# EAGLE board PCB (EAGLE 9.7.0)
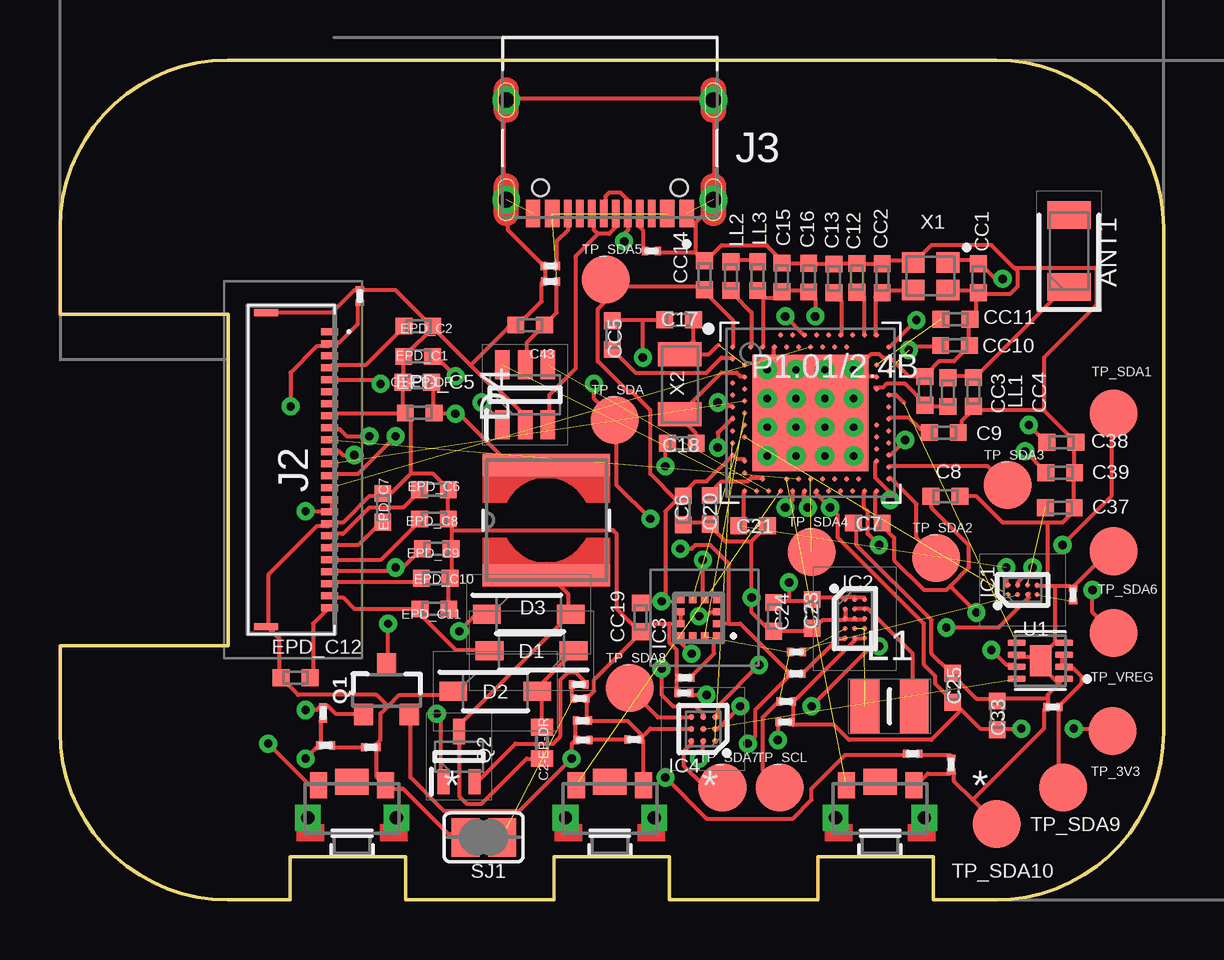
[diagram p0: board, top side]
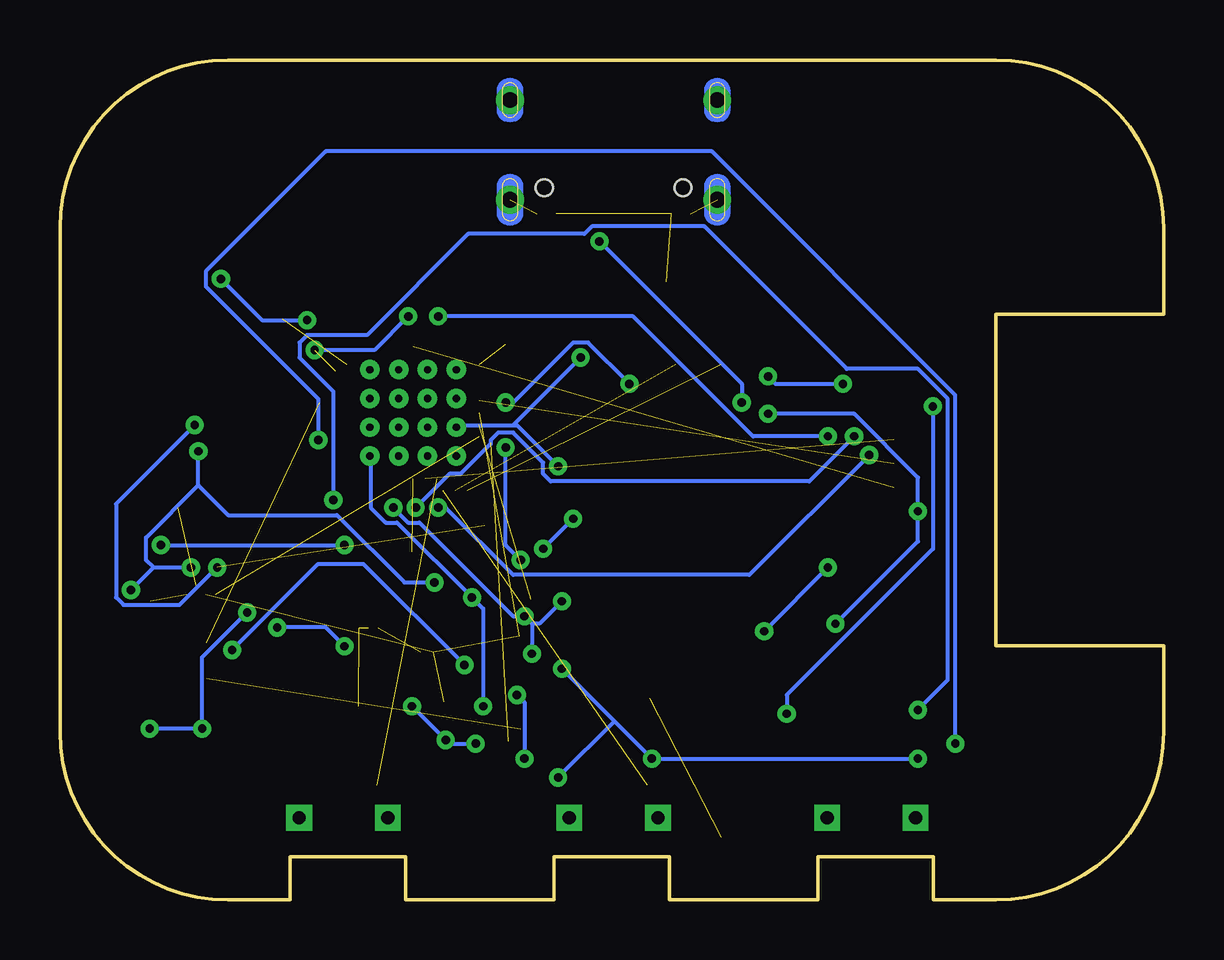
[diagram p1: board, bottom side, seen from below]

Size 46 x 35 mm. Coordinates in mm from the lower left corner, seen from the top.
Outline: 39,0 36.4,0 36.4,1.8 31.6,1.8 31.6,0 25.4,0 25.4,1.8 20.6,1.8 20.6,0 14.4,0 14.4,1.8 9.6,1.8 9.6,0 7,0 arc-90 0,7 0,10.6 7,10.6 7,24.4 0,24.4 0,28 arc-90 7,35 39,35 arc-90 46,28 46,7 arc-90 39,0
Copper layers (1*16): Top 0.035mm / dielectric 1.5mm / Bottom 0.035mm
Design rules "Fusion Electronics Design Rules": minimum track width 0.16mm, minimum drill 0.35mm, track to track 6mil, track to pad 6mil, pad to pad 6mil, via to via 6mil, smd to smd 6mil, copper to edge 40mil, drill to drill 6mil, minimum pad ring 10mil, minimum via ring 8mil, stop-mask expansion 4mil, vias tented up to drill 9999mil, thermal gap 10mil
tKeepout: area 40.9,24.6 to 43.3,29.4
bKeepout: area 40.9,24.7 to 43.3,29.3

## Footprints (pad centres in the part's own frame; a part is rotated, then mirrored left to right if it is on the bottom)
2450AT18B100E_ANTC3216X140N = smd 1.15 x 1.8: 1 -1.5,0; 2 1.5,0
NORDIC_NRF_3_RESC0402_M = smd 0.7 x 0.7: 1 -0.6,0; 2 0.6,0
GRM011R60J152KE01L_1_0201 = smd 0.35 x 0.25: 1 0,0.275; 2 0,-0.275
ESP32_C6_LIBRARY_1_ESP32_WROVER_EAGLE-LTSPICE_C0402 = smd 0.7 x 0.9: 1 -0.65,0; 2 0.65,0
ESP32_C6_LIBRARY_5_SOD3716X135N = smd 1.15 x 0.8: 1 -1.75,0; 2 1.75,0
ESP32_C6_LIBRARY_3_SOT95P280X145-6N = smd 1.2 x 0.6: 1 -1.25,0.95; 2 -1.25,0; 3 -1.25,-0.95; 4 1.25,-0.95; 5 1.25,0; 6 1.25,0.95
BQ25180YBGR_BGA8C40P2X4_100X155X50 = smd 0.2 x 0.2: A1 -0.2,0.6; A2 0.2,0.6; B1 -0.2,0.2; B2 0.2,0.2; C1 -0.2,-0.2; C2 0.2,-0.2; D1 -0.2,-0.6; D2 0.2,-0.6
RT6160AWSC_BGA15C40P3X5_140X230X60 = smd 0.216 x 0.216: A1 -0.4,0.8; A2 0,0.8; A3 0.4,0.8; B1 -0.4,0.4; B2 0,0.4; B3 0.4,0.4; C1 -0.4,0; C2 0,0; C3 0.4,0; D1 -0.4,-0.4; D2 0,-0.4; D3 0.4,-0.4; E1 -0.4,-0.8; E2 0,-0.8; E3 0.4,-0.8
BMA423_BMA423 = smd 0.3 x 0.35: 1 -0.75,-0.775; 2 -0.25,-0.775; 3 0.25,-0.775; 4 0.75,-0.775; 7 0.75,0.775; 8 0.25,0.775; 9 -0.25,0.775; 10 -0.75,0.775 | smd 0.35 x 0.3: 5 0.775,-0.25; 6 0.775,0.25; 11 -0.775,0.25; 12 -0.775,-0.25
DRV2605YZFR_BGA9C50P3X3_144X144X62 = smd 0.25 x 0.25: A1 -0.5,0.5; A2 0,0.5; A3 0.5,0.5; B1 -0.5,0; B2 0,0; B3 0.5,0; C1 -0.5,-0.5; C2 0,-0.5; C3 0.5,-0.5
503480-2400_5034802400 = smd 0.3 x 0.7: 1 -5.75,1.525; 2 -5.25,1.525; 3 -4.75,1.525; 4 -4.25,1.525; 5 -3.75,1.525; 6 -3.25,1.525; 7 -2.75,1.525; 8 -2.25,1.525; 9 -1.75,1.525; 10 -1.25,1.525; 11 -0.75,1.525; 12 -0.25,1.525; 13 0.25,1.525; 14 0.75,1.525; 15 1.25,1.525; 16 1.75,1.525; 17 2.25,1.525; 18 2.75,1.525; 19 3.25,1.525; 20 3.75,1.525; 21 4.25,1.525; 22 4.75,1.525; 23 5.25,1.525; 24 5.75,1.525 | smd 0.3 x 1: MP1 -6.54,-1.125; MP2 6.54,-1.125
KH-TYPE-C-16P_KINGHELM_KH-TYPE-C-16P = smd 0.6 x 1.15: A1_B12 -3.2,4.725; A4_B9 -2.4,4.725; A9_B4 2.4,4.725; A12_B1 3.2,4.725 | smd 0.3 x 1.15: A5 -1.25,4.725; A6 -0.25,4.725; A7 0.25,4.725; A8 1.25,4.725; B5 1.75,4.725; B6 0.75,4.725; B7 -0.75,4.725; B8 -1.75,4.725 | drill 0.65 pad 1.05: SH1 -4.32,0; SH2 4.32,0; SH3 -4.32,4.15; SH4 4.32,4.15 | hole 0.7: -2.89,3.65; 2.89,3.65
MLP2016SR47MT0S1_INDC2016X100N = smd 1.2 x 2.2: 1 -1.028,0; 2 1.028,0
ESP32_C6_LIBRARY_2_IND_4828-WE-TPC_WRE = smd 0.9 x 5.3: 1 -2.286,0; 2 2.286,0
NORDIC_NRF_2_RESC0402_M = smd 0.7 x 0.7: 1 -0.6,0; 2 0.6,0
NORDIC_NRF_4_AQFN50P700X700X85_HS-74N = smd 4.85 x 4.85: P$74 0,0 | drill 0.3 pad 0.6: P$75 -1.8,1.8; P$76 -0.6,1.8; P$77 0.6,1.8; P$78 1.8,1.8; P$79 -1.8,0.6; P$80 -0.6,0.6; P$81 0.6,0.6; P$82 1.8,0.6; P$83 -1.8,-0.6; P$84 -0.6,-0.6; P$85 0.6,-0.6; P$86 1.8,-0.6; P$87 -1.8,-1.8; P$88 -0.6,-1.8; P$89 0.6,-1.8; P$90 1.8,-1.8 | smd 0.2 x 0.2: P$A8 -1.25,3.25; P$A10 -0.75,3.25; P$A12 -0.25,3.25; P$A14 0.25,3.25; P$A16 0.75,3.25; P$A18 1.25,3.25; P$A20 1.75,3.25; P$A22 2.25,3.25; P$A23 2.75,3.25; P$AA24 3.25,-2.25; P$AB2 -2.75,-2.5; P$AC5 -2,-2.75; P$AC9 -1,-2.75; P$AC11 -0.5,-2.75; P$AC13 0,-2.75; P$AC15 0.5,-2.75; P$AC17 1,-2.75; P$AC19 1.5,-2.75; P$AC21 2,-2.75; P$AC24 3.25,-2.75; P$AD2 -2.75,-3.25; P$AD4 -2.25,-3.25; P$AD6 -1.75,-3.25; P$AD8 -1.25,-3.25; P$AD10 -0.75,-3.25; P$AD12 -0.25,-3.25; P$AD14 0.25,-3.25; P$AD16 0.75,-3.25; P$AD18 1.25,-3.25; P$AD20 1.75,-3.25; P$AD22 2.25,-3.25; P$AD23 2.75,-3.25; P$B1 -3.25,2.75; P$B3 -2.5,2.75; P$B5 -2,2.75; P$B7 -1.5,2.75; P$B9 -1,2.75; P$B11 -0.5,2.75; P$B13 0,2.75; P$B15 0.5,2.75; P$B17 1,2.75; P$B19 1.5,2.75; P$B24 3.25,2.75; P$C1 -3.25,2.25; P$D2 -2.75,2; P$D23 2.75,2; P$E24 3.25,1.75; P$F2 -2.75,1.5; P$F23 2.75,1.5; P$G1 -3.25,1.25; P$H2 -2.75,1; P$H23 2.75,1; P$J1 -3.25,0.75; P$J24 3.25,0.75; P$K2 -2.75,0.5; P$L1 -3.25,0.25; P$L24 3.25,0.25; P$M2 -2.75,0; P$N1 -3.25,-0.25; P$N24 3.25,-0.25; P$P2 -2.75,-0.5; P$P23 2.75,-0.5; P$R1 -3.25,-0.75; P$R24 3.25,-0.75; P$T2 -2.75,-1; P$T23 2.75,-1; P$U1 -3.25,-1.25; P$U24 3.25,-1.25; P$V23 2.75,-1.5; P$W1 -3.25,-1.75; P$W24 3.25,-1.75; P$Y2 -2.75,-2; P$Y23 2.75,-2
ESP32_C6_LIBRARY_4_ESP32_C6_LIBRARY_4_ESP32_C6_LIBRARY_4_ESP32_C6_LIBRARY_4_ESP32_WROVER_SPARKFUN-DISCRETESEMI_SOT23-3 = smd 0.8 x 0.9: 1 -0.95,-1; 2 0.95,-1; 3 0,1.1
ESP32_C6_LIBRARY_6_SOT65P210X110-3N = smd 1.05 x 0.5: 1 -1.05,0.65; 2 -1.05,-0.65; 3 1.05,0
CPF0201D7K68C1_0201 = smd 0.35 x 0.25: 1 0,0.275; 2 0,-0.275
ESP32_C6_LIBRARY_7_JUMPER_SJ = smd 1.168 x 1.6: 1 -0.762,0; 2 0.762,0
2025-10-22_07-23-44_LIBRARY_SW_EVP-AKE31A_PAN = smd 0.711 x 1.092: 1 -1.4,-0.972; 2 1.4,-0.972 | drill 0.559 pad 0.914 square: 3 -1.848,0.381; 4 1.848,0.381 | smd 1.397 x 1.092: 5 0,-1.124
HECTOR_WATCH_1_TP20R = smd 2 x 2: TP 0,0
ESP32_C6_LIBRARY_SON50P200X200X80-9N = smd 0.76 x 0.27: 1 -0.985,0.75; 2 -0.985,0.25; 3 -0.985,-0.25; 4 -0.985,-0.75; 5 0.985,-0.75; 6 0.985,-0.25; 7 0.985,0.25; 8 0.985,0.75 | smd 0.9 x 1.3: 9 0,0
NORDIC_NRF_BT-XTAL_2016_N = smd 0.95 x 0.85: 1 -0.725,-0.575; 2 0.725,-0.575; 3 0.725,0.575; 4 -0.725,0.575
NORDIC_NRF_1_XTAL_3215_N = smd 1 x 1.8: 1 -1.25,0; 2 1.25,0

## Placement (x,y rotation side)
ANT1  2450AT18B100E_2450AT18B100E  [2450AT18B100E_ANTC3216X140N]  42.06,27.04 90 top
C1-EP-DR  10uF  [NORDIC_NRF_3_RESC0402_M]  14.89,21.58 180 top
C2  GRM011R60J152KE01L_1_GRM011R60J152KE01L  [GRM011R60J152KE01L_1_0201]  41.39,8.04 90 top
C2-EP-DR  4.7uF/25V  [ESP32_C6_LIBRARY_1_ESP32_WROVER_EAGLE-LTSPICE_C0402]  20.09,6.54 270 top
C3  1uF  [GRM011R60J152KE01L_1_0201]  26.01,8.62 90 top
C4  0.1uF  [GRM011R60J152KE01L_1_0201]  21.78,7.47 270 top
C5  GRM011R60J152KE01L_1_GRM011R60J152KE01L  [GRM011R60J152KE01L_1_0201]  12.96,6.36 270 top
C6  4.7uF  [NORDIC_NRF_3_RESC0402_M]  25.98,16.24 90 top
C7  100nF  [NORDIC_NRF_3_RESC0402_M]  33.67,15.71 180 top
C8  100nF  [NORDIC_NRF_3_RESC0402_M]  36.91,16.83 0 top
C9  820pF  [NORDIC_NRF_3_RESC0402_M]  36.84,19.48 0 top
C10  GRM011R60J152KE01L_1_GRM011R60J152KE01L  [GRM011R60J152KE01L_1_0201]  23.92,6.69 270 top
C11  GRM011R60J152KE01L_1_GRM011R60J152KE01L  [GRM011R60J152KE01L_1_0201]  37.15,5.64 180 top
C12  100pF  [NORDIC_NRF_3_RESC0402_M]  33.22,25.92 90 top
C13  N.C  [NORDIC_NRF_3_RESC0402_M]  32.26,25.9 90 top
C15  1uF  [NORDIC_NRF_3_RESC0402_M]  30.09,25.94 90 top
C16  47nF  [NORDIC_NRF_3_RESC0402_M]  31.21,25.93 90 top
C17  12pF  [NORDIC_NRF_3_RESC0402_M]  25.81,24.18 180 top
C18  12pF  [NORDIC_NRF_3_RESC0402_M]  25.92,19.03 180 top
C20  4.7uF  [NORDIC_NRF_3_RESC0402_M]  27.1,16.25 90 top
C21  4.7uF  [NORDIC_NRF_3_RESC0402_M]  28.89,15.6 0 top
C23  0.1uF  [NORDIC_NRF_3_RESC0402_M]  31.35,11.92 90 top
C24  10uF  [NORDIC_NRF_3_RESC0402_M]  29.75,11.79 90 top
C25  22uF  [NORDIC_NRF_3_RESC0402_M]  37.21,8.84 90 top
C33  22uF  [NORDIC_NRF_3_RESC0402_M]  39.06,7.69 90 top
C37  1uF  [NORDIC_NRF_3_RESC0402_M]  41.67,16.34 0 top
C38  1uF  [NORDIC_NRF_3_RESC0402_M]  41.74,19.07 0 top
C39  10uF  [NORDIC_NRF_3_RESC0402_M]  41.69,17.81 0 top
C42  GRM011R60J152KE01L_1_GRM011R60J152KE01L  [GRM011R60J152KE01L_1_0201]  20.45,25.77 90 top
C43  4.7uF  [NORDIC_NRF_3_RESC0402_M]  19.6,23.96 180 top
CC1  12pF  [NORDIC_NRF_3_RESC0402_M]  38.28,25.91 270 top
CC2  12pF  [NORDIC_NRF_3_RESC0402_M]  34.27,25.91 90 top
CC3  1pF  [NORDIC_NRF_3_RESC0402_M]  36.05,21.21 270 top
CC4  1pF  [NORDIC_NRF_3_RESC0402_M]  38.08,21.17 90 top
CC5  100nF  [NORDIC_NRF_3_RESC0402_M]  23.02,23.54 270 top
CC10  N.C  [NORDIC_NRF_3_RESC0402_M]  37.31,23.11 0 top
CC11  100pF  [NORDIC_NRF_3_RESC0402_M]  37.32,24.2 0 top
CC14  4.7uF  [NORDIC_NRF_3_RESC0402_M]  26.87,26.03 270 top
CC19  100nF  [NORDIC_NRF_3_RESC0402_M]  24.2,11.78 270 top
D1  ESP32_C6_LIBRARY_5_MBR0530  [ESP32_C6_LIBRARY_5_SOD3716X135N]  19.66,10.38 180 top
D2  ESP32_C6_LIBRARY_5_MBR0530  [ESP32_C6_LIBRARY_5_SOD3716X135N]  18.15,8.69 0 top
D3  ESP32_C6_LIBRARY_5_MBR0530  [ESP32_C6_LIBRARY_5_SOD3716X135N]  19.53,11.9 0 top
D4  ESP32_C6_LIBRARY_3_USBLC6-2SC6Y  [ESP32_C6_LIBRARY_3_SOT95P280X145-6N]  19.39,21.05 90 top
EPD_C1  1uF/50V  [NORDIC_NRF_3_RESC0402_M]  14.93,22.65 0 top
EPD_C2  1uF/50V  [NORDIC_NRF_3_RESC0402_M]  14.94,23.91 180 top
EPD_C5  0.1uF/50V  [NORDIC_NRF_3_RESC0402_M]  15,20.29 0 top
EPD_C6  1uF/50V  [NORDIC_NRF_3_RESC0402_M]  15.59,17.09 180 top
EPD_C7  1uF/50V  [NORDIC_NRF_3_RESC0402_M]  13.46,16.34 270 top
EPD_C8  1uF/50V  [NORDIC_NRF_3_RESC0402_M]  15.59,15.88 180 top
EPD_C9  1uF/50V  [NORDIC_NRF_3_RESC0402_M]  15.71,14.64 180 top
EPD_C10  1uF/50V  [NORDIC_NRF_3_RESC0402_M]  15.66,13.41 180 top
EPD_C11  1uF/50V  [NORDIC_NRF_3_RESC0402_M]  15.61,12.13 180 top
EPD_C12  1uF/50V  [NORDIC_NRF_3_RESC0402_M]  9.82,9.26 0 top
IC1  BQ25180YBGR_BQ25180YBGR  [BQ25180YBGR_BGA8C40P2X4_100X155X50]  40.13,12.92 90 top
IC2  RT6160AWSC_RT6160AWSC  [RT6160AWSC_BGA15C40P3X5_140X230X60]  33.13,11.72 0 top
IC3  BMA423_BMA423  [BMA423_BMA423]  26.62,11.75 90 top
IC4  DRV2605YZFR_DRV2605YZFR  [DRV2605YZFR_BGA9C50P3X3_144X144X62]  26.8,7.12 180 top
J2  503480-2400_503480-2400  [503480-2400_5034802400]  9.72,17.93 270 top
J3  KH-TYPE-C-16P_KH-TYPE-C-16P  [KH-TYPE-C-16P_KINGHELM_KH-TYPE-C-16P]  22.92,33.33 180 top
L1  MLP2016SR47MT0S1_FTC252012SR47MBCA  [MLP2016SR47MT0S1_INDC2016X100N]  34.57,8.07 180 top
L2  ESP32_C6_LIBRARY_2_744043680IND_4828-WE-TPC_WRE  [ESP32_C6_LIBRARY_2_IND_4828-WE-TPC_WRE]  20.27,15.83 90 top
LL1  3.9nH  [NORDIC_NRF_2_RESC0402_M]  37.01,21.16 90 top
LL2  10uH  [NORDIC_NRF_2_RESC0402_M]  27.97,26 270 top
LL3  15uH  [NORDIC_NRF_2_RESC0402_M]  29.08,25.99 90 top
P1.01/2.4B  NORDIC_NRF_4_NRF52840_QF  [NORDIC_NRF_4_AQFN50P700X700X85_HS-74N]  31.28,20.3 0 top
Q1  20V/4.2A/52mΩ/1.4W  [ESP32_C6_LIBRARY_4_ESP32_C6_LIBRARY_4_ESP32_C6_LIBRARY_4_ESP32_C6_LIBRARY_4_ESP32_WROVER_SPARKFUN-DISCRETESEMI_SOT23-3]  13.61,8.73 0 top
Q2  ESP32_C6_LIBRARY_6_SI1308EDL-T1-GE3  [ESP32_C6_LIBRARY_6_SOT65P210X110-3N]  16.64,5.97 90 top
R1  10K  [CPF0201D7K68C1_0201]  42.23,12.72 0 top
R2  CPF0201D7K68C1_CPF0201D7K68C1  [CPF0201D7K68C1_0201]  30.7,10.33 90 top
R3  CPF0201D7K68C1_CPF0201D7K68C1  [CPF0201D7K68C1_0201]  30.68,9.43 90 top
R4  CPF0201D7K68C1_CPF0201D7K68C1  [CPF0201D7K68C1_0201]  30.27,8.27 90 top
R5  CPF0201D7K68C1_CPF0201D7K68C1  [CPF0201D7K68C1_0201]  30.22,7.41 90 top
R6  CPF0201D7K68C1_CPF0201D7K68C1  [CPF0201D7K68C1_0201]  12.5,25.17 0 top
R7  CPF0201D7K68C1_CPF0201D7K68C1  [CPF0201D7K68C1_0201]  10.97,7.79 0 top
R8  CPF0201D7K68C1_CPF0201D7K68C1  [CPF0201D7K68C1_0201]  26.05,9.26 270 top
R9  CPF0201D7K68C1_CPF0201D7K68C1  [CPF0201D7K68C1_0201]  21.62,8.98 90 top
R10  CPF0201D7K68C1_CPF0201D7K68C1  [CPF0201D7K68C1_0201]  21.68,8.4 270 top
R11  CPF0201D7K68C1_CPF0201D7K68C1  [CPF0201D7K68C1_0201]  11.07,6.45 270 top
R12  CPF0201D7K68C1_CPF0201D7K68C1  [CPF0201D7K68C1_0201]  21.81,6.67 270 top
R13  CPF0201D7K68C1_CPF0201D7K68C1  [CPF0201D7K68C1_0201]  35.54,6.09 270 top
R14  CPF0201D7K68C1_CPF0201D7K68C1  [CPF0201D7K68C1_0201]  24.66,27.04 90 top
R15  CPF0201D7K68C1_CPF0201D7K68C1  [CPF0201D7K68C1_0201]  20.44,26.41 90 top
SJ1  0  [ESP32_C6_LIBRARY_7_JUMPER_SJ]  17.66,2.61 0 top
SW1  2025-10-22_07-23-44_LIBRARY_EVP-AKE31ASW_EVP-AKE31A_PAN  [2025-10-22_07-23-44_LIBRARY_SW_EVP-AKE31A_PAN]  22.92,3.81 180 top
SW2  2025-10-22_07-23-44_LIBRARY_EVP-AKE31ASW_EVP-AKE31A_PAN  [2025-10-22_07-23-44_LIBRARY_SW_EVP-AKE31A_PAN]  34.18,3.81 180 top
SW3  2025-10-22_07-23-44_LIBRARY_EVP-AKE31ASW_EVP-AKE31A_PAN  [2025-10-22_07-23-44_LIBRARY_SW_EVP-AKE31A_PAN]  12.17,3.81 180 top
TP_3V3  HECTOR_WATCH_1_TPTP20R  [HECTOR_WATCH_1_TP20R]  43.87,7.04 0 top
TP_SCL  HECTOR_WATCH_1_TPTP20R  [HECTOR_WATCH_1_TP20R]  30.01,4.69 0 top
TP_SDA  HECTOR_WATCH_1_TPTP20R  [HECTOR_WATCH_1_TP20R]  23.13,20.01 0 top
TP_SDA1  HECTOR_WATCH_1_TPTP20R  [HECTOR_WATCH_1_TP20R]  43.91,20.27 0 top
TP_SDA2  HECTOR_WATCH_1_TPTP20R  [HECTOR_WATCH_1_TP20R]  36.53,14.26 0 top
TP_SDA3  HECTOR_WATCH_1_TPTP20R  [HECTOR_WATCH_1_TP20R]  39.5,17.29 0 top
TP_SDA4  HECTOR_WATCH_1_TPTP20R  [HECTOR_WATCH_1_TP20R]  31.33,14.5 0 top
TP_SDA5  HECTOR_WATCH_1_TPTP20R  [HECTOR_WATCH_1_TP20R]  22.74,25.86 0 top
TP_SDA6  HECTOR_WATCH_1_TPTP20R  [HECTOR_WATCH_1_TP20R]  43.91,14.53 0 top
TP_SDA7  HECTOR_WATCH_1_TPTP20R  [HECTOR_WATCH_1_TP20R]  27.62,4.68 0 top
TP_SDA8  HECTOR_WATCH_1_TPTP20R  [HECTOR_WATCH_1_TP20R]  23.75,8.84 0 top
TP_SDA9  HECTOR_WATCH_1_TPTP20R  [HECTOR_WATCH_1_TP20R]  41.81,4.68 0 top
TP_SDA10  HECTOR_WATCH_1_TPTP20R  [HECTOR_WATCH_1_TP20R]  39.05,3.17 0 top
TP_VREG  HECTOR_WATCH_1_TPTP20R  [HECTOR_WATCH_1_TP20R]  43.91,11.12 0 top
U1  ESP32_C6_LIBRARY_MAX17048G+T10  [ESP32_C6_LIBRARY_SON50P200X200X80-9N]  40.87,9.97 180 top
X1  32MHz  [NORDIC_NRF_BT-XTAL_2016_N]  36.29,25.99 180 top
X2  32.768KHz  [NORDIC_NRF_1_XTAL_3215_N]  25.84,21.48 90 top

## Library data of the parts
ANT1 = InkTime_v5; ARROW_PART_NUMBER: 2450AT18B100E; ARROW_PRICE-STOCK: https://www.arrow.com/en/products/2450at18b100e/johanson-dielectrics?utm_currency=USD&region=nac; DESCRIPTION: Antennas 2.45GHz ANTENNA; HEIGHT: 1.4mm; MANUFACTURER_NAME: JOHANSON TECHNOLOGY; MANUFACTURER_PART_NUMBER: 2450AT18B100E; MOUSER_PART_NUMBER: 609-2450AT18B100E; MOUSER_PRICE-STOCK: https://www.mouser.co.uk/ProductDetail/Johanson-Technology/2450AT18B100E?qs=yCnrNFeXz%252Bh5MFsFIXGZGA%3D%3D
C1-EP-DR C2-C13 C15-C18 C20 C21 C23-C25 C33 C37-C39 C42 C43 CC1-CC5 CC10 CC11 CC14 CC19 EPD_C1 EPD_C2 EPD_C5-EPD_C12 LL1-LL3 P1.01/2.4B R1-R15 SJ1 TP_3V3 TP_SCL TP_SDA TP_SDA1-TP_SDA10 TP_VREG X1 X2 = InkTime_v5
C2-EP-DR = InkTime_v5; SPICEMODEL: NONE; SPICEPREFIX: C
D1-D3 = InkTime_v5; AVAILABILITY: In Stock; CHECK_PRICES: https://www.snapeda.com/parts/MBR0530/Onsemi/view-part/?ref=eda; DESCRIPTION: Diode Schottky 30 V 500mA Surface Mount SOD-123; MF: ON Semiconductor; MP: MBR0530; PACKAGE: SOD-123-2 ON Semiconductor; PRICE: None; PURCHASE-URL: https://www.snapeda.com/api/url_track_click_mouser/?unipart_id=179458&manufacturer=ON Semiconductor&part_name=MBR0530&search_term=None; SNAPEDA_LINK: https://www.snapeda.com/parts/MBR0530/Onsemi/view-part/?ref=snap
D4 = InkTime_v5; AVAILABILITY: In Stock; CHECK_PRICES: https://www.snapeda.com/parts/USBLC6-2SC6Y/STMicroelectronics/view-part/?ref=eda; DESCRIPTION: 17V Clamp 5A (8/20µs) Ipp Tvs Diode Surface Mount SOT-23-6; MF: STMicroelectronics; MP: USBLC6-2SC6Y; PACKAGE: SOT-23-6 STMicroelectronics; PRICE: None; SNAPEDA_LINK: https://www.snapeda.com/parts/USBLC6-2SC6Y/STMicroelectronics/view-part/?ref=snap
IC1 = InkTime_v5; ARROW_PART_NUMBER: BQ25180YBGR; ARROW_PRICE-STOCK: https://www.arrow.com/en/products/bq25180ybgr/texas-instruments?utm_currency=USD&region=nac; DESCRIPTION: Charger IC Lithium Ion/Polymer, Lithium Iron Phosphate 8-DSBGA (1.6x1.1); HEIGHT: 0.5mm; MANUFACTURER_NAME: Texas Instruments; MANUFACTURER_PART_NUMBER: BQ25180YBGR; MOUSER_PART_NUMBER: 595-BQ25180YBGR; MOUSER_PRICE-STOCK: https://www.mouser.co.uk/ProductDetail/Texas-Instruments/BQ25180YBGR?qs=doiCPypUmgEWjAK%252BJAX6Tw%3D%3D
IC2 = InkTime_v5; DESCRIPTION: Buck-Boost Regulator Positive Output Step-Up/Step-Down I2C DC-DC Controller IC 15-WL-CSP (BSC) (1.4x2.3); HEIGHT: 0.6mm; MANUFACTURER_NAME: RICHTEK; MANUFACTURER_PART_NUMBER: RT6160AWSC; MOUSER_PART_NUMBER: 835-RT6160AWSC; MOUSER_PRICE-STOCK: https://www.mouser.co.uk/ProductDetail/Richtek/RT6160AWSC?qs=amGC7iS6iy%2FLd9PSoixZXQ%3D%3D
IC3 = InkTime_v5; ARROW_PART_NUMBER: BMA423; ARROW_PRICE-STOCK: https://www.arrow.com/en/products/bma423/bosch; DESCRIPTION: Accelerometers Triaxial low-g 12bit Acceleration Sensor; HEIGHT: 1mm; MANUFACTURER_NAME: BOSCH; MANUFACTURER_PART_NUMBER: BMA423; MOUSER_PART_NUMBER: 262-BMA423; MOUSER_PRICE-STOCK: https://www.mouser.co.uk/ProductDetail/Bosch-Sensortec/BMA423?qs=HXFqYaX1Q2xC%252BSgeGoX3mg%3D%3D
IC4 = InkTime_v5; ARROW_PART_NUMBER: DRV2605YZFR; ARROW_PRICE-STOCK: https://www.arrow.com/en/products/drv2605yzfr/texas-instruments?region=nac; DESCRIPTION: Haptic Driver for ERM/LRA with Built-In Library and Smart Loop Architecture; HEIGHT: 0.625mm; MANUFACTURER_NAME: Texas Instruments; MANUFACTURER_PART_NUMBER: DRV2605YZFR
J2 = InkTime_v5; DESCRIPTION: FFC & FPC Connectors 0.5mm FPC RA SMT Dual Contact 24Ckt; HEIGHT: 1.87mm; MANUFACTURER_NAME: Molex; MANUFACTURER_PART_NUMBER: 503480-2400; MOUSER_PART_NUMBER: 538-503480-2400; MOUSER_PRICE-STOCK: https://www.mouser.co.uk/ProductDetail/Molex/503480-2400?qs=OAhjpuo3Vu7efIoxFh9AOw%3D%3D
J3 = InkTime_v5; AVAILABILITY: Not in stock; CHECK_PRICES: https://www.snapeda.com/parts/KH-TYPE-C-16P/Kinghelm/view-part/?ref=eda; MF: kinghelm; MP: KH-TYPE-C-16P; PACKAGE: None; PRICE: None; SNAPEDA_LINK: https://www.snapeda.com/parts/KH-TYPE-C-16P/Kinghelm/view-part/?ref=snap
L1 = InkTime_v5; DESCRIPTION: SMD / SMT Inductors (Coils), L=0.47?H, L x W x T :; HEIGHT: 1mm; JLCPCB: https://jlcpcb.com/partdetail/6763488-FTC252012SR47MBCA/C5832368; MANUFACTURER_NAME: TDK; MANUFACTURER_PART_NUMBER: FTC252012SR47MBCA
L2 = InkTime_v5; COPYRIGHT: Copyright (C) 2024 Ultra Librarian. All rights reserved.; MANUFACTURER_PART_NUMBER: 744043680; MFR_NAME: Wurth Electronics
Q1 = InkTime_v5; PROD_ID: TRAN-14388
Q2 = InkTime_v5; AVAILABILITY: In Stock; CHECK_PRICES: https://www.snapeda.com/parts/SI1308EDL-T1-GE3/Vishay+Siliconix/view-part/?ref=eda; DESCRIPTION: Si1308EDL-T1-GE3 N-channel MOSFET Transistor, 1.5 A, 30 V, 3-Pin SC-70 | Siliconix / Vishay SI1308EDL-T1-GE3; MF: Vishay Siliconix; MP: SI1308EDL-T1-GE3; PACKAGE: SOT-323 Vishay Semiconductor; PRICE: None; PURCHASE-URL: https://www.snapeda.com/api/url_track_click_mouser/?unipart_id=274603&manufacturer=Vishay Siliconix&part_name=SI1308EDL-T1-GE3&search_term=None; SNAPEDA_LINK: https://www.snapeda.com/parts/SI1308EDL-T1-GE3/Vishay+Siliconix/view-part/?ref=snap
SW1-SW3 = InkTime_v5; COPYRIGHT: Copyright (C) 2025 Ultra Librarian. All rights reserved.; DIGI-KEY_PART_NUMBER_1: P123437TR-ND; DIGI-KEY_PART_NUMBER_2: P123437CT-ND; DIGI-KEY_PART_NUMBER_3: P123437DKR-ND; MANUFACTURER_NAME: Panasonic; MANUFACTURER_PART_NUMBER: EVP-AKE31A
U1 = InkTime_v5; AVAILABILITY: In Stock; CHECK_PRICES: https://www.snapeda.com/parts/MAX17048G+T10/Analog+Devices/view-part/?ref=eda; DESCRIPTION: 3µA 1-Cell/2-Cell Fuel Gauge with ModelGauge; MF: Analog Devices; MP: MAX17048G+T10; PACKAGE: TDFN-8 Maxim; PRICE: None; PURCHASE-URL: https://www.snapeda.com/api/url_track_click_mouser/?unipart_id=329239&manufacturer=Analog Devices&part_name=MAX17048G+T10&search_term=None; SNAPEDA_LINK: https://www.snapeda.com/parts/MAX17048G+T10/Analog+Devices/view-part/?ref=snap

## Nets
3V3/1.7D: C4.2 IC4.C2 Q1.2 R7.2 R11.2 R12.2 R13.2
3V3/2.4A: C6.2 C7.1 C8.1 C25.1 C33.1 CC14.2 CC19.1 IC2.E2 IC2.E3 IC3.3 IC3.7 IC3.10 P1.01/2.4B.P$AD14 P1.01/2.4B.P$AD23 P1.01/2.4B.P$B1 P1.01/2.4B.P$W1 P1.01/2.4B.P$Y2 R4.2 R5.2 TP_3V3.TP TP_SDA5.TP
ALERT: P1.01/2.4B.P$J24 U1.5
D+: D4.4 P1.01/2.4B.P$AD6
D-: D4.6 P1.01/2.4B.P$AD4
DN: D4.1 J3.A7 J3.B7
DP: D4.3 J3.A6 J3.B6
EPD_3V3: C1-EP-DR.1 EPD_C5.2 J2.15 J2.16 L2.2 Q1.3
EPD_BUSY: J2.9 P1.01/2.4B.P$AD12
EPD_CS: J2.12 P1.01/2.4B.P$K2
EPD_DC: J2.11 P1.01/2.4B.P$AD10
EPD_RST: J2.10 P1.01/2.4B.P$AC11
GDR: J2.2 Q2.1 R6.2
GND: C1-EP-DR.2 C2.1 C3.1 C4.1 C5.1 C6.1 C7.2 C8.2 C9.2 C10.1 C11.1 C12.2 C13.2 C15.2 C16.2 C17.2 C18.2 C20.1 C21.2 C23.1 C24.1 C25.2 C33.2 C37.2 C38.2 C39.2 C42.1 C43.2 CC1.2 CC2.2 CC3.1 CC4.1 CC5.1 CC10.2 CC11.2 CC14.1 CC19.2 D2.1 D4.2 EPD_C1.1 EPD_C2.1 EPD_C5.1 EPD_C6.1 EPD_C7.1 EPD_C8.1 EPD_C9.1 EPD_C10.1 EPD_C11.1 EPD_C12.1 IC1.D2 IC2.B1 IC2.C1 IC2.C2 IC2.C3 IC3.8 IC3.9 IC4.B1 IC4.B3 J2.8 J2.17 J2.MP1 J2.MP2 J3.A1_B12 J3.A12_B1 J3.SH1 J3.SH2 J3.SH3 J3.SH4 P1.01/2.4B.P$74 P1.01/2.4B.P$75 P1.01/2.4B.P$76 P1.01/2.4B.P$77 P1.01/2.4B.P$78 P1.01/2.4B.P$79 P1.01/2.4B.P$80 P1.01/2.4B.P$81 P1.01/2.4B.P$82 P1.01/2.4B.P$83 P1.01/2.4B.P$84 P1.01/2.4B.P$85 P1.01/2.4B.P$86 P1.01/2.4B.P$87 P1.01/2.4B.P$88 P1.01/2.4B.P$89 P1.01/2.4B.P$90 P1.01/2.4B.P$B7 P1.01/2.4B.P$F23 R1.1 R6.1 R8.2 R10.1 R14.2 R15.1 SJ1.1 SW1.1 SW2.1 SW3.1 TP_SDA6.TP TP_SDA10.TP U1.1 U1.4 U1.6 U1.9 X1.2 X1.4
HAPTIC_EN: IC4.A1 P1.01/2.4B.P$U1
IMU_INT1: IC3.5 P1.01/2.4B.P$N1
IMU_INT2: IC3.6 P1.01/2.4B.P$P2
LX1: IC2.B2 IC2.B3 L1.1
LX2: IC2.D2 IC2.D3 L1.2
MOSI: J2.14 P1.01/2.4B.P$B13
N$1: IC1.D1 R1.2
N$2: C9.1 P1.01/2.4B.P$N24
N$3: CC3.2 LL1.1 P1.01/2.4B.P$H23
N$4: IC2.D1 R2.2
N$5: IC2.E1 R3.2
N$6: C20.2 P1.01/2.4B.P$AC5
N$7: ANT1.1 CC4.2 LL1.2
N$8: CC1.1 P1.01/2.4B.P$B24 X1.1
N$9: CC2.1 P1.01/2.4B.P$A23 X1.3
N$10: CC11.1 P1.01/2.4B.P$D23
N$11: C18.1 P1.01/2.4B.P$F2 X2.1
N$12: C12.1 P1.01/2.4B.P$A22
N$13: C13.1 P1.01/2.4B.P$A18
N$14: LL2.1 LL3.2
N$15: LL2.2 P1.01/2.4B.P$B3
N$17: C15.1 C16.1 CC10.1 LL3.1 P1.01/2.4B.P$B5 P1.01/2.4B.P$E24
N$18: C17.1 P1.01/2.4B.P$D2 X2.2
N$19: IC3.1 R8.1
N$20: CC5.2 P1.01/2.4B.P$C1
N$21: C2-EP-DR.1 D1.1 D2.2
N$22: Q2.2 R9.2
N$23: R9.1 R10.2 SJ1.2
N$24: C2-EP-DR.2 D3.2 L2.1 Q2.3
N$25: EPD_C2.2 J2.4
N$26: EPD_C1.2 J2.5
N$27: J3.B5 R15.2
N$28: EPD_C7.2 J2.19
N$29: C5.2 R11.1
N$30: EPD_C12.2 J2.24
N$31: EPD_C6.2 J2.18
N$32: EPD_C8.2 J2.20
N$33: C10.2 R12.1
N$34: EPD_C10.2 J2.22
N$35: C11.2 R13.1
N$36: J3.A5 R14.1
N$37: C3.2 IC4.A2
OUT+: IC4.A3 TP_SDA7.TP
OUT-: IC4.C3 TP_SDA8.TP
P0.04: P1.01/2.4B.P$J1
P0.09: P1.01/2.4B.P$L24
P0.13: P1.01/2.4B.P$AD8 SW1.2
P0.14: P1.01/2.4B.P$AC9 SW2.2
P0.19: P1.01/2.4B.P$AC15
P0.20: P1.01/2.4B.P$AD16
P0.21: P1.01/2.4B.P$AC17
P0.22: P1.01/2.4B.P$AD18
P0.23: P1.01/2.4B.P$AC19
P0.24: P1.01/2.4B.P$AD20
P0.25: P1.01/2.4B.P$AC21
P0.26: P1.01/2.4B.P$G1
P0.27: P1.01/2.4B.P$H2
P0.28: P1.01/2.4B.P$B11
P0.29: P1.01/2.4B.P$A10
P0.30: P1.01/2.4B.P$B9
P0.31: P1.01/2.4B.P$A8
P1.01: P1.01/2.4B.P$Y23 Q1.1 R7.1
P1.02: P1.01/2.4B.P$W24 SW3.2
P1.03: P1.01/2.4B.P$V23
P1.04: P1.01/2.4B.P$U24
P1.05: P1.01/2.4B.P$T23
P1.06: P1.01/2.4B.P$R24
P1.07: P1.01/2.4B.P$P23
P1.09: P1.01/2.4B.P$R1
P1.10: P1.01/2.4B.P$A20
P1.11: P1.01/2.4B.P$B19
P1.12: P1.01/2.4B.P$B17
P1.13: P1.01/2.4B.P$A16
P1.14: P1.01/2.4B.P$B15
P1.15: P1.01/2.4B.P$A14
PMIC_INT: IC1.A1 P1.01/2.4B.P$T2
PREVGH: D3.1 EPD_C9.2 J2.21
PREVGL: D1.2 EPD_C11.2 J2.23
RESE: J2.3
RESET: P1.01/2.4B.P$AC13 TP_SDA4.TP
SCK: J2.13 P1.01/2.4B.P$A12
SCL/1.4C: IC4.C1 U1.7
SCL/2.4C: IC1.B1 IC3.12 P1.01/2.4B.P$M2 R2.1 R4.1 TP_SCL.TP
SDA/1.4C: IC4.B2 U1.8
SDA/2.4C: IC1.C1 IC3.2 P1.01/2.4B.P$L1 R3.1 R5.1 TP_SDA.TP
SWDCLK: P1.01/2.4B.P$AA24 TP_SDA3.TP
SWDIO: P1.01/2.4B.P$AC24 TP_SDA2.TP
SWO: P1.01/2.4B.P$AD22 TP_SDA1.TP
VBAT/1.2A: C2.2 TP_SDA9.TP U1.2 U1.3
VBAT/2.5C: C37.1 IC1.C2
VBUS/1.5D: C42.2 C43.1 D4.5 J3.A4_B9 J3.A9_B4
VBUS/2.6D: C21.1 C38.1 IC1.A2 P1.01/2.4B.P$AD2
VREG: C23.2 C24.2 C39.1 IC1.B2 IC2.A1 IC2.A2 IC2.A3 TP_VREG.TP

## Tracks (layer width: path | path; a pad name or v marks a point on that pad's centre or on a via)
3V3/1.7D  (via drill 0.35)
  Top 0.16: R7.2 10.86,7.45 10.86,6.51 R11.2 10.71,6.36 v10.24,5.89 | v25.08,9.64 25.08,8.54 25.55,8.07 26.48,8.07 26.8,7.76 26.8,7.61 IC4.C2 | C4.2 21.49,7.45 21.49,6.82 R12.2 21.49,6.67 21.33,6.51 v21.33,5.89 19.14,3.7 16.02,3.7 14.61,5.11 14.61,7.61 Q1.2 | v25.23,5.11 26.95,3.39 30.54,3.39 31.33,4.17 31.33,4.64 32.73,6.04 35.23,6.04 R13.2
  Bottom 0.16: 22.89,7.45 v21.33,5.89 v10.24,5.89 | 22.89,7.45 v25.08,9.64 | 22.89,7.45 v25.23,5.11
3V3/2.4A  (via drill 0.35)
  Top 0.16: P1.01/2.4B.P$B1 28.05,23.07 28.05,24.16 26.8,25.41 CC14.2 26.8,25.57 23.05,25.57 | 23.05,25.57 22.89,25.73 TP_SDA5.TP 23.05,25.57 | v26.33,10.26 25.86,10.73 25.86,10.89 IC3.10 | v26.64,11.82 26.95,11.82 27.11,11.98 27.26,11.98 IC3.3 | 25.23,12.45 v25.08,12.45 24.3,12.45 CC19.1 | 25.23,12.45 25.7,12.45 IC3.7 | 28.05,18.54 28.2,18.38 28.51,18.38 P1.01/2.4B.P$Y2 | 28.05,18.54 26.95,17.45 26.48,17.45 26.01,16.98 C6.2 | 28.05,18.54 P1.01/2.4B.P$W1 | 25.23,12.45 25.23,16.2 25.7,16.67 | 25.7,16.67 25.86,16.82 C6.2 | 23.05,25.57 23.05,25.26 22.42,24.63 22.42,22.45 23.67,21.2 23.83,21.2 24.61,20.41 24.61,17.76 25.7,16.67 | 25.7,16.67 C6.2 | P1.01/2.4B.P$AD23 33.98,16.98 33.98,15.88 34.14,15.73 C7.1 34.29,15.57 34.76,15.1 34.76,14.17 36.01,12.92 36.95,12.92 37.11,13.07 | 37.11,13.07 37.89,13.85 37.89,14.79 36.32,16.35 36.32,16.82 C8.1 | 33.2,10.89 33.51,10.89 IC2.E3 | 30.54,8.23 33.2,10.89 | 33.2,10.89 IC2.E2 | 30.54,8.23 30.54,7.45 R5.2 30.54,7.29 32.26,7.29 32.89,6.67 36.32,6.67 37.57,7.92 | 30.54,8.23 R4.2 | P1.01/2.4B.P$AD14 31.48,16.98 v32.11,16.35 32.42,16.04 32.42,15.1 36.01,11.51 36.01,9.79 36.48,9.32 36.48,9.01 37.11,8.39 C25.1 37.26,8.23 37.57,7.92 | 37.57,7.92 38.35,7.14 38.98,7.14 C33.1 39.14,7.14 v40.07,7.14 | v42.26,7.14 43.82,7.14 TP_3V3.TP | v38.2,11.98 37.11,13.07
  Bottom 0.16: 26.33,11.51 v26.33,10.26 | 26.33,11.51 v26.64,11.82 27.11,11.82 31.01,15.73 31.48,15.73 v32.11,16.35 | 26.33,11.51 26.01,11.51 v25.08,12.45 | v42.26,7.14 v40.07,7.14 40.07,10.1 v38.2,11.98
ALERT  (1 unrouted)
  Top 0.16: P1.01/2.4B.P$J24 34.85,21.05 35.18,20.72
D+  (1 unrouted)
D-  (1 unrouted)
DN  (via drill 0.35)
  Top 0.16: J3.A7 22.74,28.69 22.74,29.32 22.89,29.47 23.36,29.47 23.67,29.16 23.67,28.69 J3.B7 23.67,28.54 23.67,27.91 23.52,27.76 v23.52,27.44 | v17.58,20.73 18.36,19.95 D4.1
  Bottom 0.16: v17.58,20.73 17.58,21.51 v23.52,27.44
DP
  Top 0.16: 22.42,27.76 22.27,27.91 22.27,28.54 J3.B6 | 22.42,27.76 22.89,27.76 23.2,28.07 23.2,28.54 J3.A6 | 22.42,27.76 21.49,26.82 21.49,22.13 20.39,21.04 20.39,19.95 D4.3
EPD_3V3  (via drill 0.35)
  Top 0.16: C1-EP-DR.1 15.55,21.51 15.55,20.41 EPD_C5.2 15.71,20.26 v16.49,20.26 16.64,20.26 18.67,18.23 20.24,18.23 L2.2 | J2.15 11.33,16.67 11.33,16.2 J2.16 11.18,16.2 v10.24,16.2 | v13.68,11.51 13.68,9.95 Q1.3
  Bottom 0.16: v13.68,11.51 10.24,14.95 v10.24,16.2 10.24,17.6 12.9,20.26 v16.49,20.26
EPD_BUSY  (via drill 0.35)
  Top 0.16: v31.17,16.35 31.01,16.51 31.01,16.98 P1.01/2.4B.P$AD12 | v12.9,19.32 11.96,19.32 11.65,19.63 11.33,19.63 J2.9
  Bottom 0.16: v31.17,16.35 29.76,17.76 29.3,17.76 28.05,19.01 28.05,19.16 27.73,19.48 27.11,19.48 25.86,18.23 25.86,17.76 25.55,17.45 14.77,17.45 v12.9,19.32
EPD_CS  (1 unrouted)
EPD_DC  (via drill 0.35)
  Top 0.16: v30.23,16.35 30.54,16.67 30.54,16.98 P1.01/2.4B.P$AD10 | v12.27,18.54 11.8,18.54 11.65,18.7 11.33,18.7 J2.11
  Bottom 0.16: v30.23,16.35 29.92,16.35 27.11,13.54 17.27,13.54 v12.27,18.54
EPD_RST  (1 unrouted)
GDR  (via drill 0.35)
  Top 0.16: R6.2 12.43,24.79 12.43,24.01 11.65,23.23 11.33,23.23 J2.2 11.18,23.07 10.71,23.07 9.61,21.98 v9.61,20.57 | v15.71,7.76 15.86,7.61 15.86,4.95 Q2.1
  Bottom 0.16: v15.71,7.76 15.71,8.54 9.61,14.63 v9.61,20.57
GND  (via drill 0.35)  (2 unrouted)
  Top 0.16: 13.68,8.07 13.36,7.76 13.36,6.67 13.21,6.51 C5.1 13.21,6.36 13.21,5.11 13.52,4.8 SW3.1 13.68,4.64 14.3,4.64 16.17,2.76 16.8,2.76 SJ1.1 | 13.68,8.07 14.14,8.54 16.33,8.54 D2.1 | 13.68,8.07 13.21,8.54 9.93,8.54 9.3,9.17 EPD_C12.1 9.15,9.32 9.15,10.89 8.68,11.35 J2.MP2 8.68,11.51 8.68,13.54 10.71,15.57 11.18,15.57 J2.17 11.33,15.73 11.8,15.73 12.9,16.82 13.36,16.82 EPD_C7.1 13.52,16.98 13.83,16.98 14.61,17.76 | C3.1 25.7,8.7 25.7,9.17 R8.2 25.7,9.32 25.7,10.42 25.39,10.73 25.39,11.51 | IC3.8 25.86,11.98 IC3.9 25.7,11.51 25.39,11.51 | 25.39,11.51 24.61,11.51 24.3,11.2 CC19.2 | 21.95,8.39 21.95,7.61 C4.1 22.11,7.45 23.67,7.45 24.3,6.82 | 24.3,6.82 24.61,7.14 26.33,7.14 IC4.B3 | 24.3,6.82 C10.1 24.3,6.67 24.3,4.8 SW1.1 | 21.95,8.39 22.27,8.7 22.27,9.17 24.14,11.04 CC19.2 | 21.95,8.39 R10.1 | EPD_C11.1 16.17,12.14 16.17,13.39 EPD_C10.1 16.33,13.54 16.33,14.63 EPD_C9.1 16.33,14.79 16.33,15.42 | 16.33,15.42 16.33,15.73 EPD_C8.1 16.17,15.88 16.17,16.98 EPD_C6.1 16.17,17.13 15.55,17.76 14.61,17.76 | J2.8 11.33,20.26 14.3,20.26 EPD_C5.1 | EPD_C5.1 14.3,20.41 14.3,21.51 C1-EP-DR.2 14.3,21.66 14.3,22.6 EPD_C1.1 14.46,22.76 15.55,23.85 | J2.MP1 8.68,24.48 11.33,24.48 12.27,25.41 12.43,25.41 R6.1 12.58,25.41 13.99,25.41 15.39,24.01 EPD_C2.1 15.55,23.85 | 15.55,23.85 17.11,22.29 | 17.11,22.29 18.05,21.35 18.21,21.35 19.3,20.26 19.3,19.95 D4.2 | 17.11,22.29 18.67,23.85 18.99,23.85 C43.2 19.14,24.01 20.08,24.94 20.08,25.73 C42.1 20.24,25.88 20.24,26.35 R15.1 20.08,26.51 18.67,27.91 18.67,29.16 J3.SH4 18.52,29.32 18.52,33.22 J3.SH2 18.67,33.38 27.11,33.38 J3.SH1 27.26,33.22 27.26,29.32 J3.SH3 27.26,29.16 27.26,29.01 26.48,28.23 26.48,26.98
  Top 0.16: 14.61,17.76 14.61,20.1 14.46,20.26 EPD_C5.1 | 16.33,15.42 23.05,15.42 23.2,15.26 23.2,12.14 24.14,11.2 CC19.2 | C9.2 37.57,19.63 37.57,19.95 38.04,20.41 CC4.1 38.2,20.41 41.01,20.41 | 41.17,15.73 41.79,15.73 42.26,16.2 C37.2 42.26,16.35 42.26,17.76 C39.2 42.26,17.91 42.26,19.01 C38.2 42.26,19.16 41.01,20.41 | 41.17,15.73 39.29,15.73 38.2,16.82 37.57,16.82 C8.2 | SW2.1 35.7,4.8 36.17,5.26 37.11,5.26 C11.1 37.26,5.26 37.26,4.95 38.04,4.17 | 38.04,4.17 38.98,3.23 TP_SDA10.TP | 41.48,13.07 42.1,13.07 R1.1 42.26,13.07 43.82,14.63 TP_SDA6.TP | 41.48,13.07 41.17,13.07 | 41.17,13.07 40.7,13.07 IC1.D2 | 40.85,10.1 39.92,10.1 U1.6 | 41.48,10.73 41.79,10.73 U1.4 41.48,10.73 | 40.85,10.1 41.48,10.73 | 40.85,10.1 U1.9 41.01,9.95 41.01,9.64 41.63,9.01 | 41.17,8.39 41.17,8.54 41.63,9.01 | 41.17,8.39 41.17,8.07 C2.1 41.01,7.92 41.01,7.14 38.04,4.17 | 41.63,9.01 41.79,9.17 U1.1 | 41.17,8.39 39.14,8.39 C33.2 38.98,8.39 38.2,8.39 37.26,9.32 C25.2 37.11,9.48 36.32,10.26 36.32,11.67 33.2,14.79 33.2,15.57 C7.2 | 41.48,10.73 41.48,13.07 | 41.17,13.07 41.17,15.73 | C6.1 26.01,15.73 26.95,15.73 C20.1 27.11,15.57 27.73,14.95 28.83,14.95 | 28.83,14.95 29.45,15.57 C21.2 | IC2.B1 32.73,12.14 32.73,11.82 IC2.C1 32.73,11.67 | IC2.C3 33.51,11.67 33.2,11.67 IC2.C2 33.04,11.67 32.73,11.67 | 32.73,11.67 31.79,11.67 31.48,11.35 C23.1 31.33,11.2 29.76,11.2 C24.1 29.61,11.2 28.83,11.98 v28.83,12.6 28.83,14.95 | v28.36,8.07 27.42,7.14 IC4.B1 | 26.48,26.98 24.92,26.98 R14.2 | 26.48,26.98 26.8,26.66 CC14.1 26.95,26.66 27.58,27.29 29.45,27.29 30.08,26.66 C15.2 30.23,26.51 31.17,26.51 C16.2 31.33,26.51 32.11,26.51 C13.2 33.2,26.51 C12.2 33.36,26.51 34.14,26.51 CC2.2 34.29,26.66 35.54,26.66 X1.2 35.7,26.66 36.32,27.29 38.82,27.29 39.76,26.35
  Top 0.16: 24.3,24.16 25.08,24.16 C17.2 | 24.3,24.16 23.05,24.16 CC5.1 | v25.23,18.07 25.23,19.01 C18.2 | v24.3,22.6 24.3,24.16 | CC1.2 38.2,25.41 37.11,25.41 X1.4 | CC1.2 38.2,25.26 38.2,24.48 38.04,24.32 CC11.2 37.89,24.16 37.89,23.23 CC10.2 37.89,23.07 37.26,22.45 36.64,22.45 36.17,21.98 36.17,21.82 CC3.1 36.01,21.82 35.39,21.82 34.61,22.6 34.29,22.6 34.14,22.76 33.82,22.76 33.2,22.13 P1.01/2.4B.P$78 33.2,21.98 | 29.61,22.13 29.76,22.29 29.76,23.07 P1.01/2.4B.P$B7 | 33.2,21.98 33.36,21.82 33.98,21.82 P1.01/2.4B.P$F23 | 30.54,18.54 29.61,18.54 P1.01/2.4B.P$87 | 30.54,18.54 P1.01/2.4B.P$88 | 30.54,18.54 P1.01/2.4B.P$74 | 31.95,18.54 31.95,19.63 P1.01/2.4B.P$74 | P1.01/2.4B.P$74 30.86,19.48 30.7,19.63 P1.01/2.4B.P$84 30.54,19.79 29.61,19.79 P1.01/2.4B.P$83 | P1.01/2.4B.P$74 31.79,19.79 P1.01/2.4B.P$85 31.95,19.79 33.04,19.79 P1.01/2.4B.P$86 | 30.08,21.51 29.61,21.04 P1.01/2.4B.P$79 | P1.01/2.4B.P$80 30.7,21.04 P1.01/2.4B.P$74 | P1.01/2.4B.P$81 31.95,20.88 P1.01/2.4B.P$74 | 29.61,22.13 P1.01/2.4B.P$75 | 29.61,22.13 P1.01/2.4B.P$74 | 30.08,21.51 30.54,21.98 P1.01/2.4B.P$76 | 30.08,21.51 P1.01/2.4B.P$74 | P1.01/2.4B.P$82 33.04,21.04 32.58,21.51 P1.01/2.4B.P$74 | P1.01/2.4B.P$77 31.95,21.98 32.58,21.35 P1.01/2.4B.P$74 | 33.2,21.98 P1.01/2.4B.P$74 | 39.76,26.35 39.92,26.19 39.92,25.57 39.6,25.26 38.35,25.26 CC1.2 | 31.95,18.54 33.04,18.54 P1.01/2.4B.P$90 | 31.95,18.54 P1.01/2.4B.P$89 | 41.01,20.41 41.01,22.6 43.2,24.79 43.2,26.35 39.76,26.35
  Bottom 0.16: v28.36,8.07 28.36,12.14 v28.83,12.6 31.95,15.73 32.42,15.73 33.04,16.35 33.04,18.38 P1.01/2.4B.P$90 | v25.23,18.07 26.95,19.79 27.11,19.79 | 27.11,19.79 29.45,19.79 P1.01/2.4B.P$83 | 27.11,19.79 v24.3,22.6
HAPTIC_EN  (1 unrouted)
IMU_INT1  (via drill 0.35)
  Top 0.16: v27.42,18.85 27.42,19.48 28.05,20.1 P1.01/2.4B.P$N1 | v26.8,14.17 26.8,12.6 IC3.5
  Bottom 0.16: v27.42,18.85 27.42,14.79 v26.8,14.17
IMU_INT2  (1 unrouted)
LX1
  Top 0.16: 33.51,12.14 33.2,12.14 IC2.B2 | 33.51,12.14 33.67,12.14 35.54,10.26 35.54,8.07 L1.1 | 33.51,12.14 IC2.B3
LX2  (2 unrouted)
MOSI  (1 unrouted)
N$1  (1 unrouted)
N$2
  Top 0.16: P1.01/2.4B.P$N24 34.61,20.1 35.39,20.1 35.86,19.63 36.17,19.63 C9.1
N$3
  Top 0.16: P1.01/2.4B.P$H23 33.98,21.35 34.29,21.35 34.45,21.51 35.23,21.51 36.01,20.73 CC3.2 36.17,20.57 36.95,20.57 LL1.1
N$4  (1 unrouted)
N$5
  Top 0.16: IC2.E1 32.73,10.89 32.42,10.89 31.01,9.48 R3.2
N$6
  Top 0.16: P1.01/2.4B.P$AC5 29.3,17.6 28.83,17.6 28.67,17.45 27.58,17.45 27.11,16.98 C20.2
N$7
  Top 0.16: LL1.2 37.11,21.82 38.04,21.82 CC4.2 38.2,21.82 41.95,25.57 ANT1.1
N$8  (via drill 0.35)
  Top 0.16: v35.7,24.16 34.61,23.07 P1.01/2.4B.P$B24 | v39.29,25.88 38.98,25.88 38.35,26.51 CC1.1 38.2,26.66 37.11,26.66 X1.1
  Bottom 0.16: v35.7,24.16 37.57,24.16 v39.29,25.88
N$9
  Top 0.16: P1.01/2.4B.P$A23 33.98,23.54 33.98,25.1 34.14,25.26 CC2.1 34.29,25.41 35.54,25.41 X1.3
N$10  (1 unrouted)
N$11
  Top 0.16: P1.01/2.4B.P$F2 28.51,21.82 28.36,21.82 28.2,21.98 27.58,21.98 25.86,20.26 X2.1 25.86,20.1 26.48,19.48 26.48,19.16 C18.1
N$12
  Top 0.16: P1.01/2.4B.P$A22 33.51,23.54 33.51,25.1 33.36,25.26 C12.1
N$13
  Top 0.16: P1.01/2.4B.P$A18 32.58,23.54 32.58,24.94 32.26,25.26 C13.1
N$14
  Top 0.16: LL2.1 28.05,26.66 28.98,26.66 LL3.2
N$15
  Top 0.16: P1.01/2.4B.P$B3 28.83,23.07 28.83,24.48 28.05,25.26 LL2.2
N$17  (via drill 0.35)  (1 unrouted)
  Top 0.16: 29.3,25.1 29.3,23.07 P1.01/2.4B.P$B5 | 29.3,25.1 29.14,25.26 LL3.1 29.3,25.1 | v35.39,22.91 35.54,23.07 36.64,23.07 CC10.1 | v31.48,24.32 31.48,25.1 31.33,25.26 C16.1 31.17,25.41 30.23,25.41 C15.1 30.08,25.26 29.92,25.1 29.3,25.1
  Bottom 0.16: v35.39,22.91 32.89,22.91 v31.48,24.32
N$18  (1 unrouted)
  Top 0.16: C17.1 26.41,23.3 X2.2 27.05,22.73 27.45,23.13
N$19
  Top 0.16: R8.1 26.33,9.32 27.26,10.26 27.26,10.89 IC3.1
N$20
  Top 0.16: 28.05,22.6 P1.01/2.4B.P$C1 28.05,22.6 | CC5.2 23.05,22.91 23.99,21.98 26.95,21.98 27.58,22.6 28.05,22.6
N$21
  Top 0.16: C2-EP-DR.1 20.08,7.29 20.08,8.39 19.92,8.54 D2.2 19.77,8.7 21.33,10.26 D1.1
N$22
  Top 0.16: R9.2 21.8,9.01 21.8,9.17 21.49,9.48 21.17,9.48 20.86,9.17 20.86,6.82 20.55,6.51 18.99,6.51 17.42,4.95 Q2.2
N$23  (1 unrouted)
  Top 0.16: R10.2 21.33,8.54 21.33,8.86 R9.1
N$24
  Top 0.16: L2.1 20.39,13.54 21.17,12.76 21.17,11.98 D3.2 21.17,11.82 16.49,7.14 Q2.3 16.64,6.98 16.64,4.33 16.96,4.01 17.58,4.01 19.46,5.89 C2-EP-DR.2
N$25
  Top 0.16: J2.4 11.33,22.29 12.74,22.29 14.3,23.85 EPD_C2.2
N$26  (via drill 0.35)
  Top 0.16: v13.36,21.51 13.21,21.66 11.33,21.66 J2.5 | v16.49,21.82 15.55,22.76 EPD_C1.2
  Bottom 0.16: v13.36,21.51 16.17,21.51 v16.49,21.82
N$27
  Top 0.16: R15.2 20.71,26.51 20.71,27.44 21.17,27.91 21.17,28.54 J3.B5
N$28
  Top 0.16: J2.19 11.33,14.79 12.43,14.79 13.36,15.73 EPD_C7.2
N$29
  Top 0.16: C5.2 12.58,6.36 11.33,6.36 R11.1
N$30
  Top 0.16: EPD_C12.2 10.55,9.32 10.55,11.51 11.18,12.14 J2.24
N$31
  Top 0.16: J2.18 11.33,15.26 11.8,15.26 12.9,16.35 14.3,16.35 14.92,16.98 EPD_C6.2
N$32
  Top 0.16: J2.20 11.33,14.17 13.36,14.17 14.92,15.73 EPD_C8.2
N$33
  Top 0.16: R12.1 22.11,6.67 23.67,6.67 C10.2
N$34
  Top 0.16: J2.22 11.33,13.23 14.77,13.23 14.92,13.39 EPD_C10.2
N$35
  Top 0.16: C11.2 37.11,6.04 35.86,6.04 R13.1
N$36
  Top 0.16: R14.1 24.3,27.13 24.3,27.91 24.14,28.07 24.14,28.54 J3.A5
N$37  (via drill 0.35)
  Top 0.16: v26.64,5.89 26.8,6.04 26.8,6.51 IC4.A2 | v26.95,8.54 26.33,8.54 C3.2
  Bottom 0.16: v26.64,5.89 26.64,8.23 v26.95,8.54
OUT+
  Top 0.16: IC4.A3 26.33,6.51 26.01,6.2 26.01,5.58 26.8,4.8 27.58,4.8 TP_SDA7.TP
OUT-
  Top 0.16: IC4.C3 26.33,7.61 24.92,7.61 23.83,8.7 TP_SDA8.TP
P0.13  (1 unrouted)
P0.14  (1 unrouted)
P1.01  (via drill 0.35)
  Top 0.16: v34.61,16.67 34.61,16.98 33.98,17.6 33.98,18.23 P1.01/2.4B.P$Y23 | v10.24,7.92 10.71,7.92 10.86,8.07 R7.1 11.02,8.07 11.18,8.07 11.49,7.76 12.58,7.76 Q1.1
  Bottom 0.16: v34.61,16.67 34.61,21.2 36.01,22.6 36.01,23.23 35.7,23.54 33.2,23.54 28.98,27.76 24.14,27.76 23.83,28.07 19.14,28.07 13.21,22.13 10.24,22.13 8.99,20.88 8.99,9.17 v10.24,7.92
P1.02  (via drill 0.35)
  Top 0.16: v35.23,19.16 34.61,18.54 P1.01/2.4B.P$W24 | v8.68,6.51 10.4,4.8 10.71,4.8 SW3.2
  Bottom 0.16: v35.23,19.16 35.23,20.88 39.92,25.57 39.92,26.19 34.92,31.19 18.83,31.19 8.68,21.04 v8.68,6.51
PMIC_INT  (1 unrouted)
PREVGH  (via drill 0.35)
  Top 0.16: 13.99,13.7 14.14,13.7 15.08,14.63 EPD_C9.2 | 13.99,13.7 11.33,13.7 J2.21 | v16.64,11.2 17.27,11.82 17.74,11.82 D3.1 | 13.99,13.7 v13.99,13.85
  Bottom 0.16: v13.99,13.85 v16.64,11.2
PREVGL
  Top 0.16: J2.23 11.33,12.6 11.8,12.6 12.27,12.14 14.92,12.14 EPD_C11.2 14.92,11.98 16.49,10.42 17.89,10.42 D1.2
RESET  (1 unrouted)
SCK  (via drill 0.35)
  Top 0.16: v30.23,24.32 31.01,23.54 P1.01/2.4B.P$A12 | v13.99,19.32 12.43,17.76 11.33,17.76 J2.13
  Bottom 0.16: v30.23,24.32 22.11,24.32 17.11,19.32 v13.99,19.32
SCL/1.4C  (via drill 0.35)
  Top 0.16: v29.14,9.79 27.42,8.07 27.42,7.61 IC4.C1 | v38.82,10.42 39.45,9.79 39.76,9.79 U1.7
  Bottom 0.16: v29.14,9.79 33.36,14.01 35.23,14.01 v38.82,10.42
SCL/2.4C  (4 unrouted)
  Top 0.16: R4.1 29.92,8.23 29.3,7.61 29.3,5.42 29.92,4.8 TP_SCL.TP
SDA/1.4C  (1 unrouted)
SDA/2.4C  (via drill 0.35)
  Top 0.16: v27.42,20.73 27.58,20.57 28.05,20.57 P1.01/2.4B.P$L1 | v22.27,21.51 22.27,20.88 23.05,20.1 TP_SDA.TP 23.2,19.95 23.2,17.29 v24.61,15.88 | 27.89,11.51 27.42,11.51 IC3.2 | 27.89,11.51 28.36,11.51 30.39,9.48 R3.1 30.39,9.32 28.98,7.92 28.98,6.82 v28.67,6.51 | v36.95,11.35 39.14,11.35 40.39,12.6 40.39,12.76 IC1.C1 | v34.14,10.57 33.82,10.57 v31.33,8.07 | v29.92,6.67 29.92,7.29 R5.1 | v25.86,14.63 26.33,14.63 26.48,14.79 27.11,14.79 27.89,14.01 27.89,11.51
  Bottom 0.16: v27.42,20.73 27.11,20.73 24.61,23.23 23.99,23.23 v22.27,21.51 | v36.95,11.35 34.92,11.35 v34.14,10.57 | v31.33,8.07 v29.92,6.67 29.76,6.51 v28.67,6.51 | v25.86,14.63 v24.61,15.88
SWDCLK
  Top 0.16: P1.01/2.4B.P$AA24 34.61,18.07 38.67,18.07 39.45,17.29 TP_SDA3.TP
SWDIO
  Top 0.16: P1.01/2.4B.P$AC24 34.61,17.6 35.7,16.51 35.7,15.1 36.48,14.32 TP_SDA2.TP
SWO  (via drill 0.35)
  Top 0.16: v34.14,14.79 33.67,15.26 33.67,16.2 33.51,16.35 33.51,16.98 P1.01/2.4B.P$AD22 | v41.79,14.79 43.82,16.82 43.82,20.26 TP_SDA1.TP
  Bottom 0.16: v41.79,14.79 v34.14,14.79
VBAT/1.2A
  Top 0.16: U1.3 41.79,10.1 41.79,9.79 U1.2 41.95,9.64 42.26,9.64 42.57,9.32 42.57,9.01 41.63,8.07 C2.2 41.63,7.92 41.63,4.95 41.79,4.8 TP_SDA9.TP
VBAT/2.5C  (1 unrouted)
VBUS/1.5D  (2 unrouted)
  Top 0.16: C42.2 20.71,25.73 20.71,24.48 20.24,24.01 C43.1 20.08,23.85 19.46,23.23 19.46,22.45 D4.5
VBUS/2.6D  (via drill 0.35)  (1 unrouted)
  Top 0.16: v39.45,13.85 39.45,13.07 IC1.A2 | v40.39,19.79 41.01,19.16 C38.1 | P1.01/2.4B.P$AD2 28.51,16.98 28.51,15.88 28.36,15.73 C21.1
  Bottom 0.16: v39.45,13.85 41.01,12.29 43.35,12.29 43.67,12.6 43.67,16.51 v40.39,19.79
VREG  (via drill 0.35)
  Top 0.16: 33.2,12.6 32.73,12.6 | 33.2,12.6 33.51,12.6 IC2.A3 | 33.2,12.6 IC2.A2 | 32.73,12.6 31.48,12.6 C23.2 31.33,12.45 30.39,12.45 | 32.73,12.6 IC2.A1 | 30.39,12.45 29.76,12.45 C24.2 | v40.54,13.85 39.92,13.23 39.92,13.07 IC1.B2 | v43.04,12.92 43.04,11.98 43.82,11.2 TP_VREG.TP | v40.23,18.7 41.01,17.91 C39.1 | v30.39,13.23 30.39,12.45
  Bottom 0.16: 42.1,13.85 v40.54,13.85 | v43.04,12.92 42.1,13.85 | 40.23,17.29 v40.23,18.7 | 40.23,17.29 42.42,15.1 42.42,14.17 42.1,13.85 | v30.39,13.23 31.64,13.23 34.45,16.04 38.98,16.04 40.23,17.29
(copper drawn outside any net)
  shapes: Bottom area x1